# EAGLE board arca_PCAD_2021-03-29.PCB (EAGLE 9.5.0)
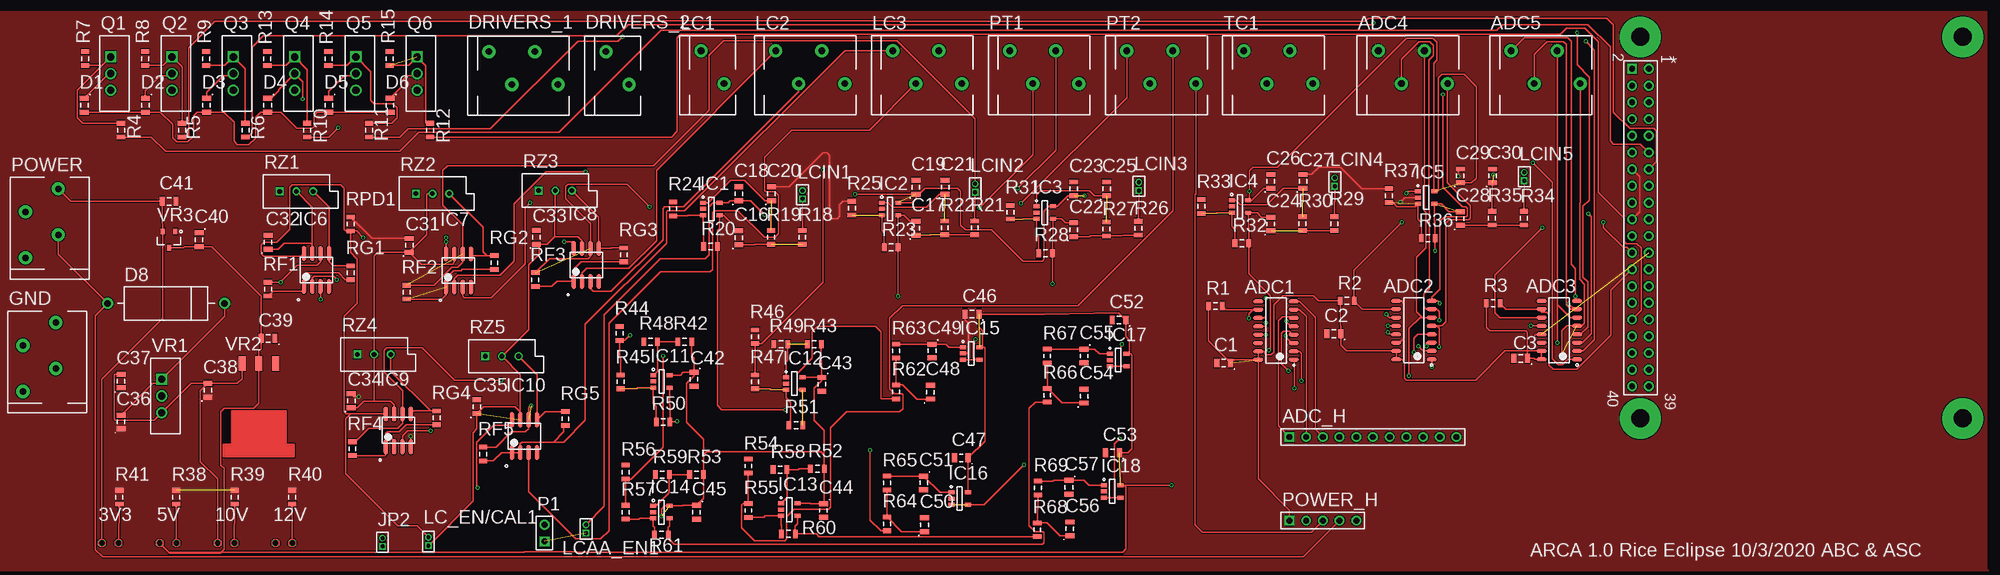
[diagram p0: board, top side]
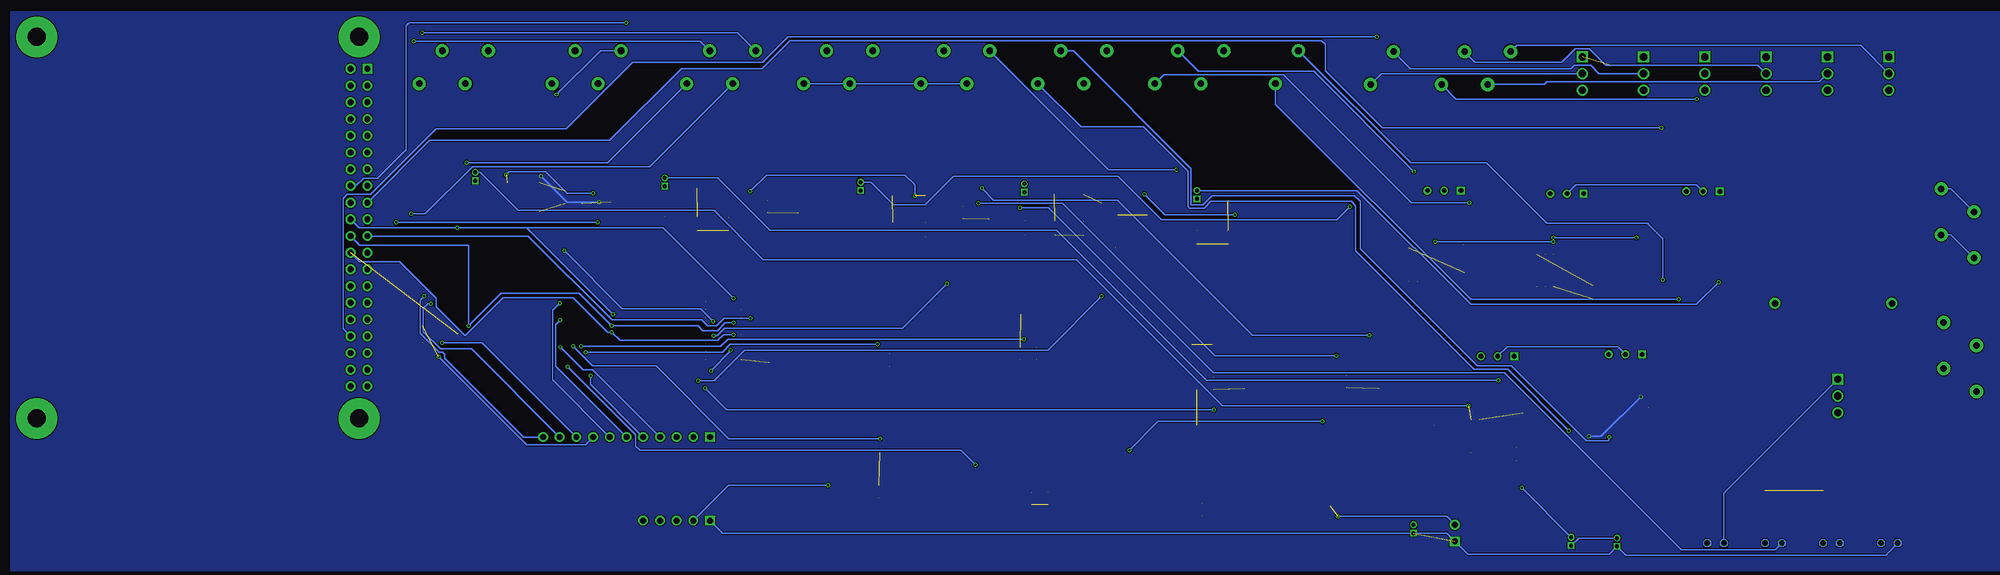
[diagram p1: board, bottom side, seen from below]

No outline drawn. Coordinates in mm, seen from the top.
Copper layers (1*16): Top 0.035mm / dielectric 1.5mm / Bottom 0.035mm
Design rules "arca_PCAD_2021-03-29": minimum track width 6mil, minimum drill 0.35mm, track to track 6mil, track to pad 6mil, pad to pad 6mil, via to via 6mil, smd to smd 6mil, copper to edge 40mil, drill to drill 6mil, minimum pad ring 0mil, minimum via ring 0mil, stop-mask expansion 4mil, vias tented up to drill 0mil, thermal gap 10mil

## Footprints (pad centres in the part's own frame; a part is rotated, then mirrored left to right if it is on the bottom)
LED5MM_1PRIMARY = drill 0.813 pad 0.584 square: 1 -1.27,0; 2 1.27,0
LED5MM_4PRIMARY = drill 0.813 pad 0.584 square: 1 -1.27,0; 2 1.27,0
LED5MM_3PRIMARY = drill 0.813 pad 0.584 square: 1 -1.27,0; 2 1.27,0
LED5MM_2PRIMARY = drill 0.813 pad 0.584 square: 1 -1.27,0; 2 1.27,0
HDR2X20_1PRIMARY = drill 0.9 pad 1.5: 1 0,2.54; 3 2.54,2.54; 4 2.54,0; 5 5.08,2.54; 6 5.08,0; 7 7.62,2.54; 8 7.62,0; 9 10.16,2.54; 10 10.16,0; 11 12.7,2.54; 12 12.7,0; 13 15.24,2.54; 14 15.24,0; 15 17.78,2.54; 16 17.78,0; 17 20.32,2.54; 18 20.32,0; 19 22.86,2.54; 20 22.86,0; 21 25.4,2.54; 22 25.4,0; 23 27.94,2.54; 24 27.94,0; 25 30.48,2.54; 26 30.48,0; 27 33.02,2.54; 28 33.02,0; 29 35.56,2.54; 30 35.56,0; 31 38.1,2.54; 32 38.1,0; 33 40.64,2.54; 34 40.64,0; 35 43.18,2.54; 36 43.18,0; 37 45.72,2.54; 38 45.72,0; 39 48.26,2.54; 40 48.26,0 | drill 0.9 pad 1.5 square: 2 0,0
SOIC127P600X175-16N_1PRIMARY = smd 1.5 x 0.6: 1 -2.7,4.445; 2 -2.7,3.175; 3 -2.7,1.905; 4 -2.7,0.635; 5 -2.7,-0.635; 6 -2.7,-1.905; 7 -2.7,-3.175; 8 -2.7,-4.445; 9 2.7,-4.445; 10 2.7,-3.175; 11 2.7,-1.905; 12 2.7,-0.635; 13 2.7,0.635; 14 2.7,1.905; 15 2.7,3.175; 16 2.7,4.445
4PINCANCONNECTOR_1PRIMARY = drill 1 pad 2: 1 0,0; 2 -5,-3.5; 3 0,-7; 4 -5,-10.5
HDR1X11_1PRIMARY = drill 0.9 pad 1.5 square: 1 0,0 | drill 0.9 pad 1.5: 2 2.54,0; 3 5.08,0; 4 7.62,0; 5 10.16,0; 6 12.7,0; 7 15.24,0; 8 17.78,0; 9 20.32,0; 10 22.86,0; 11 25.4,0
CAPCP2012X06N_3PRIMARY = smd 0.75 x 1.35: 1 -1.05,0; 2 1.05,0
CAPCP2012X06N_16PRIMARY = smd 0.75 x 1.35: 1 -1.05,0; 2 1.05,0
CAPCP2012X06N_14PRIMARY = smd 0.75 x 1.35: 1 -1.05,0; 2 1.05,0
CAPCP2012X06N_15PRIMARY = smd 0.75 x 1.35: 1 -1.05,0; 2 1.05,0
CAPCP2012X06N_13PRIMARY = smd 0.75 x 1.35: 1 -1.05,0; 2 1.05,0
CAPCP2012X06N_11PRIMARY = smd 0.75 x 1.35: 1 -1.05,0; 2 1.05,0
CAPCP2012X06N_12PRIMARY = smd 0.75 x 1.35: 1 -1.05,0; 2 1.05,0
CAPCP2012X06N_2PRIMARY = smd 0.75 x 1.35: 1 -1.05,0; 2 1.05,0
CAPCP2012X06N_10PRIMARY = smd 0.75 x 1.35: 1 -1.05,0; 2 1.05,0
CAPCP2012X06N_9PRIMARY = smd 0.75 x 1.35: 1 -1.05,0; 2 1.05,0
CAPCP2012X06N_8PRIMARY = smd 0.75 x 1.35: 1 -1.05,0; 2 1.05,0
CAPCP2012X06N_7PRIMARY = smd 0.75 x 1.35: 1 -1.05,0; 2 1.05,0
CAPCP2012X06N_6PRIMARY = smd 0.75 x 1.35: 1 -1.05,0; 2 1.05,0
CAPCP2012X06N_1PRIMARY = smd 0.75 x 1.35: 1 -1.05,0; 2 1.05,0
CAPCP2012X06N_5PRIMARY = smd 0.75 x 1.35: 1 -1.05,0; 2 1.05,0
CAPCP2012X06N_4PRIMARY = smd 0.75 x 1.35: 1 -1.05,0; 2 1.05,0
DIOC2012X06N_1PRIMARY = smd 0.75 x 1.35: 1 -1.05,0; 2 1.05,0
DIODE-0.7_1PRIMARY = drill 1 pad 1.65: 1 -8.89,0; 2 8.89,0
2POS_GREEN_BOI_1PRIMARY = drill 1 pad 2: 1 -2.286,-3.226; 2 -7.286,-6.726
P:EX244Y244D1081 = drill 2.75 pad 6.2: 1 0,0
SOT95P245X110-5N_6PRIMARY = smd 0.9 x 0.6: 1 -1.25,0.95; 2 -1.25,0; 3 -1.25,-0.95; 4 1.25,-0.95; 5 1.25,0.95
SOT95P245X110-5N_7PRIMARY = smd 0.9 x 0.6: 1 -1.25,0.95; 2 -1.25,0; 3 -1.25,-0.95; 4 1.25,-0.95; 5 1.25,0.95
SOT95P245X110-5N_5PRIMARY = smd 0.9 x 0.6: 1 -1.25,0.95; 2 -1.25,0; 3 -1.25,-0.95; 4 1.25,-0.95; 5 1.25,0.95
SOIC127P1030X265-8N_1PRIMARY = smd 2.3 x 0.6: 1 -2.5,1.905; 2 -2.5,0.635; 3 -2.5,-0.635; 4 -2.5,-1.905; 5 2.5,-1.905; 6 2.5,-0.635; 7 2.5,0.635; 8 2.5,1.905
SOIC127P1030X265-8N_2PRIMARY = smd 2.3 x 0.6: 1 -2.5,1.905; 2 -2.5,0.635; 3 -2.5,-0.635; 4 -2.5,-1.905; 5 2.5,-1.905; 6 2.5,-0.635; 7 2.5,0.635; 8 2.5,1.905
SOT95P245X110-5N_4PRIMARY = smd 0.9 x 0.6: 1 -1.25,0.95; 2 -1.25,0; 3 -1.25,-0.95; 4 1.25,-0.95; 5 1.25,0.95
SOT95P245X110-5N_2PRIMARY = smd 0.9 x 0.6: 1 -1.25,0.95; 2 -1.25,0; 3 -1.25,-0.95; 4 1.25,-0.95; 5 1.25,0.95
SOT95P245X110-5N_3PRIMARY = smd 0.9 x 0.6: 1 -1.25,0.95; 2 -1.25,0; 3 -1.25,-0.95; 4 1.25,-0.95; 5 1.25,0.95
SOT95P245X110-5N_1PRIMARY = smd 0.9 x 0.6: 1 -1.25,0.95; 2 -1.25,0; 3 -1.25,-0.95; 4 1.25,-0.95; 5 1.25,0.95
MHDR1X2_4PRIMARY = drill 0.6 pad 1 square: 1 0,0 | drill 0.6 pad 1: 2 1.27,0
2POS_GREEN_BOI_2PRIMARY = drill 1 pad 2: 1 -2.286,-3.226; 2 -7.286,-6.726
4PINCANCONNECTOR_6PRIMARY = drill 1 pad 2: 1 0,0; 2 -5,-3.5; 3 0,-7; 4 -5,-10.5
4PINCANCONNECTOR_5PRIMARY = drill 1 pad 2: 1 0,0; 2 -5,-3.5; 3 0,-7; 4 -5,-10.5
MHDR1X2_3PRIMARY = drill 0.6 pad 1 square: 1 0,0 | drill 0.6 pad 1: 2 1.27,0
MHDR1X2_2PRIMARY = drill 0.6 pad 1 square: 1 0,0 | drill 0.6 pad 1: 2 1.27,0
MHDR1X2_1PRIMARY = drill 0.6 pad 1 square: 1 0,0 | drill 0.6 pad 1: 2 1.27,0
HDR1X2_1PRIMARY = drill 0.9 pad 1.5 square: 1 0,0 | drill 0.9 pad 1.5: 2 2.54,0
HDR1X5_1PRIMARY = drill 0.9 pad 1.5 square: 1 0,0 | drill 0.9 pad 1.5: 2 2.54,0; 3 5.08,0; 4 7.62,0; 5 10.16,0
4PINCANCONNECTOR_4PRIMARY = drill 1 pad 2: 1 0,0; 2 -5,-3.5; 3 0,-7; 4 -5,-10.5
4PINCANCONNECTOR_3PRIMARY = drill 1 pad 2: 1 0,0; 2 -5,-3.5; 3 0,-7; 4 -5,-10.5
UA78M_1PRIMARY = drill 1.1 pad 1.7 square: 1 2.667,2.84 | drill 1.1 pad 1.7: 2 0.127,2.84; 3 -2.413,2.84
RESC_0805_2012_6PRIMARY = smd 0.7 x 1.25: 1 -1.05,0; 2 1.05,0
RESC_0805_2012_8PRIMARY = smd 0.7 x 1.25: 1 -1.05,0; 2 1.05,0
RESC_0805_2012_1PRIMARY = smd 0.7 x 1.25: 1 -1.05,0; 2 1.05,0
RESC_0805_2012_17PRIMARY = smd 0.7 x 1.25: 1 -1.05,0; 2 1.05,0
RESC_0805_2012_11PRIMARY = smd 0.7 x 1.25: 1 -1.05,0; 2 1.05,0
RESC_0805_2012_16PRIMARY = smd 0.7 x 1.25: 1 -1.05,0; 2 1.05,0
RESC_0805_2012_15PRIMARY = smd 0.7 x 1.25: 1 -1.05,0; 2 1.05,0
RESC_0805_2012_14PRIMARY = smd 0.7 x 1.25: 1 -1.05,0; 2 1.05,0
RESC_0805_2012_2PRIMARY = smd 0.7 x 1.25: 1 -1.05,0; 2 1.05,0
RESC_0805_2012_13PRIMARY = smd 0.7 x 1.25: 1 -1.05,0; 2 1.05,0
RESC_0805_2012_12PRIMARY = smd 0.7 x 1.25: 1 -1.05,0; 2 1.05,0
RESC_0805_2012_10PRIMARY = smd 0.7 x 1.25: 1 -1.05,0; 2 1.05,0
RESC_0805_2012_9PRIMARY = smd 0.7 x 1.25: 1 -1.05,0; 2 1.05,0
RESC_0805_2012_7PRIMARY = smd 0.7 x 1.25: 1 -1.05,0; 2 1.05,0
RESC_0805_2012_4PRIMARY = smd 0.7 x 1.25: 1 -1.05,0; 2 1.05,0
RESC_0805_2012_5PRIMARY = smd 0.7 x 1.25: 1 -1.05,0; 2 1.05,0
RESC_0805_2012_3PRIMARY = smd 0.7 x 1.25: 1 -1.05,0; 2 1.05,0
VR5_2PRIMARY = drill 0.7 pad 1.2 square: 1 -2.54,0 | drill 0.7 pad 1.2: 2 0,0; 3 2.54,0
VR5_3PRIMARY = drill 0.7 pad 1.2 square: 1 -2.54,0 | drill 0.7 pad 1.2: 2 0,0; 3 2.54,0
VR5_1PRIMARY = drill 0.7 pad 1.2 square: 1 -2.54,0 | drill 0.7 pad 1.2: 2 0,0; 3 2.54,0
4PINCANCONNECTOR_2PRIMARY = drill 1 pad 2: 1 0,0; 2 -5,-3.5; 3 0,-7; 4 -5,-10.5
LM1084ISX-5.0/NOPB_1PRIMARY = smd 2.159 x 1.067: 1 0,-2.54; 2 0,0; 3 0,2.54
SOT95P245X110-3N_1PRIMARY = smd 0.9 x 0.6: 1 -1.25,0.95; 2 -1.25,-0.95; 3 1.25,0

## Placement (x,y rotation side)
3V3  LED5MM  [LED5MM_1PRIMARY]  19.56,4.19 0 top
5V  LED5MM  [LED5MM_4PRIMARY]  28.36,4.19 0 top
10V  LED5MM  [LED5MM_3PRIMARY]  37.17,4.19 0 top
12V  LED5MM  [LED5MM_2PRIMARY]  45.97,4.19 0 top
*  raspberry_pi  [HDR2X20_1PRIMARY]  250.98,76.28 270 top
ADC1  MCP3208  [SOIC127P600X175-16N_1PRIMARY]  196.85,36.51 180 top
ADC2  MCP3208  [SOIC127P600X175-16N_1PRIMARY]  217.81,36.58 180 top
ADC3  MCP3208  [SOIC127P600X175-16N_1PRIMARY]  239.9,36.58 180 top
ADC4  PTSA_1,5/_4-3,5-Z_-_1985218  [4PINCANCONNECTOR_1PRIMARY]  212.4,79.04 90 top
ADC5  PTSA_1,5/_4-3,5-Z_-_1985218  [4PINCANCONNECTOR_1PRIMARY]  232.59,79.04 90 top
ADC_H  Header_11  [HDR1X11_1PRIMARY]  198.88,20.32 0 top
C1  Cap  [CAPCP2012X06N_3PRIMARY]  188.87,31.57 180 top
C2  Cap  [CAPCP2012X06N_3PRIMARY]  205.63,36.02 180 top
C3  Cap  [CAPCP2012X06N_3PRIMARY]  234.04,32.28 180 top
C16  1nF  [CAPCP2012X06N_16PRIMARY]  115.15,50.62 90 top
C17  1nF  [CAPCP2012X06N_14PRIMARY]  142.08,52.07 90 top
C18  0.1UF  [CAPCP2012X06N_15PRIMARY]  115.15,57.31 90 top
C19  0.1UF  [CAPCP2012X06N_14PRIMARY]  142.08,58.29 90 top
C20  1nF  [CAPCP2012X06N_15PRIMARY]  120.11,57.31 90 top
C21  1nF  [CAPCP2012X06N_14PRIMARY]  146.52,58.29 90 top
C22  1nF  [CAPCP2012X06N_14PRIMARY]  166.08,51.82 90 top
C23  0.1UF  [CAPCP2012X06N_14PRIMARY]  166.08,58.04 90 top
C24  1nF  [CAPCP2012X06N_14PRIMARY]  196.05,52.7 90 top
C25  1nF  [CAPCP2012X06N_13PRIMARY]  171.1,58.04 90 top
C26  0.1UF  [CAPCP2012X06N_14PRIMARY]  196.05,59.18 90 top
C27  1nF  [CAPCP2012X06N_13PRIMARY]  200.94,59.18 90 top
C28  1nF  [CAPCP2012X06N_11PRIMARY]  224.86,53.53 90 top
C29  0.1UF  [CAPCP2012X06N_11PRIMARY]  224.86,60.01 90 top
C30  1nF  [CAPCP2012X06N_12PRIMARY]  229.75,60.01 90 top
C31  1UF  [CAPCP2012X06N_11PRIMARY]  65.02,49.45 90 top
C32  1UF  [CAPCP2012X06N_2PRIMARY]  43.56,49.91 90 top
C33  1UF  [CAPCP2012X06N_10PRIMARY]  84.36,50.69 90 top
C34  1UF  [CAPCP2012X06N_9PRIMARY]  56.23,25.84 90 top
C35  1UF  [CAPCP2012X06N_8PRIMARY]  75.31,24.95 90 top
C36  Cap  [CAPCP2012X06N_2PRIMARY]  21.21,22.61 90 top
C37  Cap  [CAPCP2012X06N_2PRIMARY]  21.21,28.83 90 top
C38  Cap  [CAPCP2012X06N_2PRIMARY]  34.42,27.43 90 top
C39  Cap  [CAPCP2012X06N_3PRIMARY]  43.56,35.31 180 top
C40  Cap  [CAPCP2012X06N_7PRIMARY]  33.08,50.31 270 top
C41  Cap  [CAPCP2012X06N_6PRIMARY]  28.51,56.15 180 top
C42  0.1UF  [CAPCP2012X06N_1PRIMARY]  108.33,29.08 270 top
C43  0.1UF  [CAPCP2012X06N_1PRIMARY]  127.76,28.32 270 top
C44  0.1UF  [CAPCP2012X06N_1PRIMARY]  128.02,9.14 270 top
C45  0.1UF  [CAPCP2012X06N_1PRIMARY]  108.71,8.89 270 top
C46  0.1UF  [CAPCP2012X06N_5PRIMARY]  150.59,38.99 180 top
C47  0.1UF  [CAPCP2012X06N_3PRIMARY]  148.97,17.14 180 top
C48  68nF  [CAPCP2012X06N_4PRIMARY]  144.27,27.14 90 top
C49  680pF  [CAPCP2012X06N_1PRIMARY]  144.53,33.4 270 top
C50  68nF  [CAPCP2012X06N_2PRIMARY]  143.38,6.99 90 top
C51  680pF  [CAPCP2012X06N_1PRIMARY]  143.26,13.34 270 top
C52  0.1UF  [CAPCP2012X06N_3PRIMARY]  172.97,38.1 180 top
C53  0.1UF  [CAPCP2012X06N_3PRIMARY]  171.96,17.91 180 top
C54  68nF  [CAPCP2012X06N_2PRIMARY]  167.64,26.54 90 top
C55  680pF  [CAPCP2012X06N_1PRIMARY]  167.64,32.64 270 top
C56  68nF  [CAPCP2012X06N_2PRIMARY]  165.48,6.35 90 top
C57  680pF  [CAPCP2012X06N_1PRIMARY]  165.35,12.7 270 top
D1  Diode  [DIOC2012X06N_1PRIMARY]  15.62,70.74 270 top
D2  Diode  [DIOC2012X06N_1PRIMARY]  24.92,70.74 270 top
D3  Diode  [DIOC2012X06N_1PRIMARY]  34.21,70.74 270 top
D4  Diode  [DIOC2012X06N_1PRIMARY]  43.51,70.74 270 top
D5  Diode  [DIOC2012X06N_1PRIMARY]  52.81,70.74 270 top
D6  Diode  [DIOC2012X06N_1PRIMARY]  62.1,70.74 270 top
D8  Diode  [DIODE-0.7_1PRIMARY]  28.07,40.64 0 top
DRIVERS_1  1991118  [4PINCANCONNECTOR_1PRIMARY]  77.14,78.91 90 top
DRIVERS_2  0  [2POS_GREEN_BOI_1PRIMARY]  91.72,81.2 90 top
DUMMY1  [P:EX244Y244D1081]  252.25,81.15 0 top
DUMMY2  [P:EX244Y244D1081]  252.25,23.15 0 top
DUMMY3  [P:EX244Y244D1081]  301.25,23.15 0 top
DUMMY4  [P:EX244Y244D1081]  301.25,81.15 0 top
GND  1991118  [4PINCANCONNECTOR_1PRIMARY]  6.3,27.23 180 top
IC1  LMV321LICTRT  [SOT95P245X110-5N_6PRIMARY]  110.96,54.99 0 top
IC2  LMV321LICTRT  [SOT95P245X110-5N_6PRIMARY]  138.14,54.99 0 top
IC3  LMV321LICTRT  [SOT95P245X110-5N_7PRIMARY]  161.66,54.42 0 top
IC4  LMV321LICTRT  [SOT95P245X110-5N_6PRIMARY]  191.36,55.37 0 top
IC5  LMV321LICTRT  [SOT95P245X110-5N_5PRIMARY]  219.66,56.71 0 top
IC6  MCP6N11R  [SOIC127P1030X265-8N_1PRIMARY]  50.93,45.72 90 top
IC7  MCP6N11R  [SOIC127P1030X265-8N_2PRIMARY]  72.52,45.64 90 top
IC8  MCP6N11R  [SOIC127P1030X265-8N_1PRIMARY]  91.95,46.48 90 top
IC9  MCP6N11R  [SOIC127P1030X265-8N_1PRIMARY]  63.37,21.34 90 top
IC10  MCP6N11R  [SOIC127P1030X265-8N_1PRIMARY]  82.55,20.45 90 top
IC11  LMV321LICTRT  [SOT95P245X110-5N_4PRIMARY]  103.4,28.77 0 top
IC12  LMV321LICTRT  [SOT95P245X110-5N_2PRIMARY]  123.57,28.45 0 top
IC13  LMV321LICTRT  [SOT95P245X110-5N_2PRIMARY]  122.81,9.27 0 top
IC14  LMV321LICTRT  [SOT95P245X110-5N_2PRIMARY]  103.38,8.89 0 top
IC15  LMV321LICTRT  [SOT95P245X110-5N_2PRIMARY]  150.5,33.02 0 top
IC16  LMV321LICTRT  [SOT95P245X110-5N_3PRIMARY]  148.72,10.96 0 top
IC17  LMV321LICTRT  [SOT95P245X110-5N_2PRIMARY]  172.85,32 0 top
IC18  LMV321LICTRT  [SOT95P245X110-5N_1PRIMARY]  171.94,12.06 0 top
JP2  PINHD-1X2  [MHDR1X2_4PRIMARY]  60.96,3.68 90 top
LC1  0  [2POS_GREEN_BOI_2PRIMARY]  106.18,81.33 90 top
LC2  1991118  [4PINCANCONNECTOR_6PRIMARY]  120.75,79.04 90 top
LC3  1991118  [4PINCANCONNECTOR_5PRIMARY]  138.55,79.04 90 top
LC_EN/CAL1  PINHD-1X2  [MHDR1X2_4PRIMARY]  67.94,3.81 90 top
LCAA_EN1  PINHD-1X2  [MHDR1X2_3PRIMARY]  91.91,5.71 90 top
LCIN1  PINHD-1X2  [MHDR1X2_4PRIMARY]  124.84,56.52 90 top
LCIN2  PINHD-1X2  [MHDR1X2_3PRIMARY]  151.1,57.53 90 top
LCIN3  PINHD-1X2  [MHDR1X2_3PRIMARY]  175.99,57.78 90 top
LCIN4  PINHD-1X2  [MHDR1X2_2PRIMARY]  205.78,58.44 90 top
LCIN5  PINHD-1X2  [MHDR1X2_1PRIMARY]  234.59,59.27 90 top
P1  Header_2  [HDR1X2_1PRIMARY]  85.6,4.45 90 top
POWER  1991118  [4PINCANCONNECTOR_1PRIMARY]  6.68,47.55 180 top
POWER_H  Header_5  [HDR1X5_1PRIMARY]  198.88,7.62 0 top
PT1  1991118  [4PINCANCONNECTOR_4PRIMARY]  156.35,79.04 90 top
PT2  1991118  [4PINCANCONNECTOR_3PRIMARY]  174.14,79.04 90 top
Q1  FQP30N06L-ND  [UA78M_1PRIMARY]  22.48,75.44 90 top
Q2  FQP30N06L-ND  [UA78M_1PRIMARY]  31.8,75.44 90 top
Q3  FQP30N06L-ND  [UA78M_1PRIMARY]  41.12,75.44 90 top
Q4  FQP30N06L-ND  [UA78M_1PRIMARY]  50.44,75.44 90 top
Q5  FQP30N06L-ND  [UA78M_1PRIMARY]  59.77,75.44 90 top
Q6  FQP30N06L-ND  [UA78M_1PRIMARY]  69.09,75.44 90 top
R1  Res1  [RESC_0805_2012_6PRIMARY]  187.63,40.23 180 top
R2  Res1  [RESC_0805_2012_6PRIMARY]  207.65,41.02 180 top
R3  Res1  [RESC_0805_2012_6PRIMARY]  229.84,40.64 180 top
R4  Res1  [RESC_0805_2012_8PRIMARY]  21.21,66.96 90 top
R5  Res1  [RESC_0805_2012_8PRIMARY]  30.48,66.96 90 top
R6  Res1  [RESC_0805_2012_8PRIMARY]  40.13,66.96 90 top
R7  Res1  [RESC_0805_2012_1PRIMARY]  15.75,77.85 270 top
R8  Res1  [RESC_0805_2012_17PRIMARY]  24.87,77.85 270 top
R9  Res1  [RESC_0805_2012_17PRIMARY]  34.16,77.85 270 top
R10  Res1  [RESC_0805_2012_8PRIMARY]  49.53,66.96 90 top
R11  Res1  [RESC_0805_2012_8PRIMARY]  58.93,66.96 90 top
R12  Res1  [RESC_0805_2012_8PRIMARY]  68.2,66.96 90 top
R13  Res1  [RESC_0805_2012_17PRIMARY]  43.46,77.85 270 top
R14  Res1  [RESC_0805_2012_17PRIMARY]  52.76,77.85 270 top
R15  Res1  [RESC_0805_2012_17PRIMARY]  62.05,77.85 270 top
R18  24.7K  [RESC_0805_2012_11PRIMARY]  124.81,50.67 90 top
R19  164K  [RESC_0805_2012_16PRIMARY]  120.05,50.67 270 top
R20  50.6K  [RESC_0805_2012_8PRIMARY]  110.84,49.28 180 top
R21  24.7K  [RESC_0805_2012_15PRIMARY]  151.02,52.12 90 top
R22  164K  [RESC_0805_2012_14PRIMARY]  146.46,52.12 270 top
R23  50.6K  [RESC_0805_2012_6PRIMARY]  138.3,49.15 180 top
R24  12.6K  [RESC_0805_2012_2PRIMARY]  105.16,54.99 90 top
R25  12.6K  [RESC_0805_2012_2PRIMARY]  132.33,55.12 90 top
R26  24.7K  [RESC_0805_2012_2PRIMARY]  175.9,52.07 90 top
R27  164K  [RESC_0805_2012_1PRIMARY]  171.07,51.94 270 top
R28  50.6K  [RESC_0805_2012_6PRIMARY]  161.8,48.26 180 top
R29  24.7K  [RESC_0805_2012_13PRIMARY]  205.71,52.76 90 top
R30  164K  [RESC_0805_2012_12PRIMARY]  200.88,52.76 270 top
R31  12.6K  [RESC_0805_2012_11PRIMARY]  156.43,54.48 90 top
R32  50.6K  [RESC_0805_2012_6PRIMARY]  191.64,49.78 180 top
R33  12.6K  [RESC_0805_2012_11PRIMARY]  185.51,55.37 90 top
R34  24.7K  [RESC_0805_2012_10PRIMARY]  234.51,53.58 90 top
R35  164K  [RESC_0805_2012_9PRIMARY]  229.69,53.58 270 top
R36  50.6K  [RESC_0805_2012_6PRIMARY]  219.96,50.55 180 top
R37  12.6K  [RESC_0805_2012_2PRIMARY]  214,57.02 90 top
R38  140  [RESC_0805_2012_2PRIMARY]  29.59,11.18 90 top
R39  470  [RESC_0805_2012_1PRIMARY]  38.48,11.18 270 top
R40  530  [RESC_0805_2012_1PRIMARY]  47.24,11.18 270 top
R41  39  [RESC_0805_2012_2PRIMARY]  20.95,11.18 90 top
R42  20K  [RESC_0805_2012_6PRIMARY]  106.93,34.8 180 top
R43  20K  [RESC_0805_2012_6PRIMARY]  126.62,34.42 180 top
R44  22  [RESC_0805_2012_1PRIMARY]  97.03,36.07 270 top
R45  20K  [RESC_0805_2012_2PRIMARY]  97.15,28.7 90 top
R46  22  [RESC_0805_2012_1PRIMARY]  117.6,35.56 270 top
R47  20K  [RESC_0805_2012_2PRIMARY]  117.6,28.7 90 top
R48  3K  [RESC_0805_2012_6PRIMARY]  101.73,34.8 180 top
R49  3K  [RESC_0805_2012_6PRIMARY]  121.54,34.42 180 top
R50  150K  [RESC_0805_2012_6PRIMARY]  103.63,22.61 180 top
R51  150K  [RESC_0805_2012_6PRIMARY]  123.82,22.1 180 top
R52  20K  [RESC_0805_2012_8PRIMARY]  127.09,15.49 180 top
R53  20K  [RESC_0805_2012_6PRIMARY]  108.71,14.61 180 top
R54  22  [RESC_0805_2012_7PRIMARY]  116.59,15.91 270 top
R55  20K  [RESC_0805_2012_2PRIMARY]  116.59,9.14 90 top
R56  22  [RESC_0805_2012_1PRIMARY]  97.92,14.99 270 top
R57  20K  [RESC_0805_2012_2PRIMARY]  97.92,8.89 90 top
R58  3K  [RESC_0805_2012_6PRIMARY]  121.41,15.37 180 top
R59  3K  [RESC_0805_2012_6PRIMARY]  103.5,14.61 180 top
R60  150K  [RESC_0805_2012_6PRIMARY]  122.68,5.59 180 top
R61  150K  [RESC_0805_2012_6PRIMARY]  103.38,5.46 180 top
R62  1.5K  [RESC_0805_2012_1PRIMARY]  139.06,27.18 270 top
R63  150K  [RESC_0805_2012_1PRIMARY]  139.06,33.4 270 top
R64  1.5K  [RESC_0805_2012_1PRIMARY]  137.67,7.11 270 top
R65  150K  [RESC_0805_2012_1PRIMARY]  137.67,13.34 270 top
R66  1.5K  [RESC_0805_2012_1PRIMARY]  162.05,26.67 270 top
R67  150K  [RESC_0805_2012_1PRIMARY]  162.05,32.64 270 top
R68  1.5K  [RESC_0805_2012_1PRIMARY]  160.53,6.22 270 top
R69  150K  [RESC_0805_2012_1PRIMARY]  160.65,12.57 270 top
RF1  20K  [RESC_0805_2012_1PRIMARY]  43.56,42.8 270 top
RF2  20K  [RESC_0805_2012_4PRIMARY]  64.64,42.34 270 top
RF3  20K  [RESC_0805_2012_1PRIMARY]  84.2,44.26 270 top
RF4  20K  [RESC_0805_2012_1PRIMARY]  56.39,18.54 270 top
RF5  20K  [RESC_0805_2012_5PRIMARY]  76.26,17.73 270 top
RG1  200  [RESC_0805_2012_1PRIMARY]  56.13,45.28 270 top
RG2  200  [RESC_0805_2012_4PRIMARY]  77.98,46.84 270 top
RG3  200  [RESC_0805_2012_1PRIMARY]  97.66,48.01 270 top
RG4  200  [RESC_0805_2012_1PRIMARY]  69.22,23.24 270 top
RG5  200  [RESC_0805_2012_3PRIMARY]  88.77,23.13 270 top
RPD1  20K  [RESC_0805_2012_2PRIMARY]  56.13,52.7 90 top
RZ1  RPot  [VR5_2PRIMARY]  47.88,57.66 0 top
RZ2  RPot  [VR5_3PRIMARY]  68.58,57.32 0 top
RZ3  RPot  [VR5_2PRIMARY]  87.25,57.78 0 top
RZ4  RPot  [VR5_2PRIMARY]  59.69,32.89 0 top
RZ5  RPot  [VR5_1PRIMARY]  79.12,32.59 0 top
TC1  1991118  [4PINCANCONNECTOR_2PRIMARY]  191.94,79.04 90 top
VR1  UA78M  [UA78M_1PRIMARY]  30.23,26.42 90 top
VR2  LM1084ISX-5.0/NOPB  [LM1084ISX-5.0/NOPB_1PRIMARY]  42.16,31.5 90 top
VR3  AP2210N-3.3TRG1  [SOT95P245X110-3N_1PRIMARY]  28.51,50.31 270 top

## Library data of the parts
3V3 5V 10V 12V * ADC1-ADC5 ADC_H C1-C3 C16-C57 D1-D6 D8 DRIVERS_1 DRIVERS_2 DUMMY1-DUMMY4 GND IC1-IC18 JP2 LC1-LC3 LC_EN/CAL1 LCAA_EN1 LCIN1-LCIN5 P1 POWER POWER_H PT1 PT2 Q1-Q6 R1-R15 R18-R69 RF1-RF5 RG1-RG5 RPD1 RZ1-RZ5 TC1 VR1-VR3 = arca_PCAD_2021-03-29

## Nets
+3V3: 3V3.1 ADC1.16 C1.1 JP2.1 LCAA_EN1.1 P1.1 VR3.2
+3V3_LC: C31.1 C32.1 C33.1 C34.1 C35.1 IC6.7 IC7.7 IC8.7 IC9.7 IC10.7 JP2.2 LC_EN/CAL1.1 RZ1.2 RZ2.2 RZ3.2 RZ4.2 RZ5.2
+3V3_LCAA: C18.1 C19.1 C23.1 C26.1 C29.1 IC1.5 IC2.5 IC3.5 IC4.5 IC5.5 LCAA_EN1.2
+3V3_PT: C42.1 C43.1 C44.1 C45.1 IC11.5 IC12.5 IC13.5 IC14.5 P1.2 R42.1 R43.1 R52.1 R53.1
+5V: 5V.1 C39.2 C40.2 C46.1 C47.1 C52.1 C53.1 IC15.5 IC16.5 IC17.5 IC18.5 POWER_H.2 VR2.2 VR3.3
+10V: 10V.1 C37.2 C38.2 POWER_H.3 VR1.3 VR2.3
+12: D1.2 D2.2 D3.2 D4.2 D5.2 D6.2
ADC1_A5: ADC1.6 ADC_H.1
ADC1_A6: ADC1.7 ADC_H.2
ADC1_A7: ADC1.8 ADC_H.3
ADC1_CS: *.22 ADC1.10 R1.1
ADC2_A4: ADC2.5 ADC_H.4
ADC2_A5: ADC2.6 ADC_H.5
ADC2_A6: ADC2.7 ADC_H.6
ADC2_A7: ADC2.8 ADC_H.7
ADC2_CS: *.24 ADC2.10 R2.1
ADC3_A4: ADC3.5 ADC_H.8
ADC3_A5: ADC_H.9
ADC3_A6: ADC_H.10
ADC3_A7: ADC_H.11
ADC3_CS: *.26 ADC3.10 R3.1
CAL: IC6.8 IC7.8 IC8.8 IC9.8 IC10.8 LC_EN/CAL1.2 RPD1.1
DRIVER_1: *.11 R4.1
DRIVER_1_NEGATIVE: D1.1 Q1.2
DRIVER_2: *.13 R5.1
DRIVER_2_NEGATIVE: D2.1 Q2.2
DRIVER_3: *.15 R6.1
DRIVER_3_NEGATIVE: D3.1 Q3.2
DRIVER_4: *.18 R10.1
DRIVER_4_NEGATIVE: D4.1 Q4.2
DRIVER_5: *.33 R11.1
DRIVER_5_NEGATIVE: D5.1 DRIVERS_2.1 Q5.2
DRIVER_6: *.32 R12.1
DRIVER_6_NEGATIVE: D6.1 DRIVERS_2.2 Q6.2
GND: C36.1 C38.1 R38.2 R39.1 R40.1 R41.2
LC1: ADC1.1 C16.2 IC1.4 R20.1
LC1_OUT_N: IC6.2 LC1.1
LC1_OUT_P: IC6.3 LC1.2
LC1_PREC: IC6.6 LCIN1.2 RF1.1
LC2: ADC1.2 C17.2 IC2.4 R23.1
LC2_OUT_N: IC7.2
LC2_OUT_P: IC7.3
LC2_PREC: IC7.6 LCIN2.2 RF2.1
LC3: ADC1.3 C22.2 IC3.4 R28.1
LC3_OUT_N: IC8.2
LC3_OUT_P: IC8.3
LC3_PREC: IC8.6 LCIN3.2 RF3.1
LC4: ADC1.4 C24.2 IC4.4 R32.1
LC4_OUT_N: IC9.2
LC4_OUT_P: IC9.3
LC4_PREC: IC9.6 LCIN4.2 RF4.1
LC5: ADC1.5 C28.2 IC5.4 R36.1
LC5_OUT_N: IC10.1 IC10.2 RF5.2 RG5.2
LC5_OUT_P: IC10.3
LC5_PREC: IC10.6 LCIN5.2 RF5.1
MISO: *.21 ADC1.12 ADC2.12 ADC3.12
MOSI: *.19 ADC1.11 ADC2.11 ADC3.11
NET3V3_K: 3V3.2 R41.1
NET5V_K: 5V.2 R38.1
NET10V_K: 10V.2 R39.2
NET12V_A: 12V.1 C36.2 D8.2 VR1.1
NET12V_K: 12V.2 R40.2
NETC16_1: C16.1 R18.1 R19.2
NETC17_1: C17.1 R21.1 R22.2
NETC20_1: C20.1 IC1.1 R19.1
NETC21_1: C21.1 IC2.1 R22.1
NETC22_1: C22.1 R26.1 R27.2
NETC24_1: C24.1 R29.1 R30.2
NETC25_1: C25.1 IC3.1 R27.1
NETC27_1: C27.1 IC4.1 R30.1
NETC28_1: C28.1 R34.1 R35.2
NETC30_1: C30.1 IC5.1 R35.1
NETC48_1: C48.1 R62.1 R63.2
NETC49_1: C49.1 IC15.1 R63.1
NETC50_1: C50.1 R64.1 R65.2
NETC51_1: C51.1 IC16.1 R65.1
NETC54_1: C54.1 R66.1 R67.2
NETC55_1: C55.1 IC17.1 R67.1
NETC56_1: C56.1 R68.1 R69.2
NETC57_1: C57.1 IC18.1 R69.1
NETIC1_3: IC1.3 R20.2 R24.1
NETIC2_3: IC2.3 R23.2 R25.1
NETIC3_3: IC3.3 R28.2 R31.1
NETIC4_3: IC4.3 R32.2 R33.1
NETIC5_3: IC5.3 R36.2 R37.1
NETIC6_1: IC6.1 RF1.2 RG1.2
NETIC6_5: IC6.5 RG1.1 RZ1.3
NETIC7_1: IC7.1 RF2.2 RG2.2
NETIC7_5: IC7.5 RG2.1 RZ2.3
NETIC8_1: IC8.1 RF3.2 RG3.2
NETIC8_5: IC8.5 RG3.1 RZ3.3
NETIC9_1: IC9.1 RF4.2 RG4.2
NETIC9_5: IC9.5 RG4.1 RZ4.3
NETIC10_5: IC10.5 RG5.1 RZ5.3
NETIC11_1: IC11.1 R42.2 R48.1
NETIC11_3: IC11.3 R45.1 R50.2
NETIC12_1: IC12.1 R43.2 R49.1
NETIC12_3: IC12.3 R47.1 R51.2
NETIC13_1: IC13.1 R52.2 R58.1
NETIC13_3: IC13.3 R55.1 R60.2
NETIC14_1: IC14.1 R53.2 R59.1
NETIC14_3: IC14.3 R57.1 R61.2
NETLCIN1_1: LCIN1.1 R18.2
NETLCIN2_1: LCIN2.1 R21.2
NETLCIN3_1: LCIN3.1 R26.2
NETLCIN4_1: LCIN4.1 R29.2
NETLCIN5_1: LCIN5.1 R34.2
NETQ1_1: Q1.1 R4.2 R7.2
NETQ2_1: Q2.1 R5.2 R8.2
NETQ3_1: Q3.1 R6.2 R9.2
NETQ4_1: Q4.1 R10.2 R13.2
NETQ5_1: Q5.1 R11.2 R14.2
NETQ6_1: Q6.1 R12.2 R15.2
PT1: ADC2.1 IC16.3 IC16.4
PT1_OUT: R44.2 R45.2
PT1_PREC: IC11.4 R50.1 R64.2
PT2: ADC2.2 IC15.3 IC15.4
PT2_OUT: R46.2 R47.2
PT2_PREC: IC12.4 R51.1 R62.2
PT3: ADC2.3 IC18.3 IC18.4
PT3_OUT: R54.2 R55.2
PT3_PREC: IC13.4 R60.1 R68.2
PT4: ADC2.4 IC17.3 IC17.4
PT4_OUT: R56.2 R57.2
PT4_PREC: IC14.4 R61.1 R66.2
SCK: *.23 ADC1.13 ADC2.13 ADC3.13
TC3: ADC3.3
TC4: ADC3.4

## Tracks (layer width: path | path; a pad name or v marks a point on that pad's centre or on a via)
+3V3  (4 unrouted)
  Top 0.254: 235.09,33.4 231.65,33.4 227.21,28.96 216.66,28.96 216.36,29.26 216.36,31.72 215.95,32.13 215.1,32.13 215.1,33.4 207.52,33.4 206.68,34.24 206.68,36.02 206.59,38.59 206.59,41.02 203.25,41.02 202.49,41.78 197.88,41.78 196.51,40.42 196.51,33.22 196.09,32.8 195.33,32.8 195.05,33.07 195.05,33.34 194.15,33.34 ADC1.16 194.13,32.07 | 235.09,33.4 237.2,33.4 237.2,32.13 236.22,32.13 236.07,32.28 235.09,32.28 235.09,33.4 | 235.09,33.4 235.09,36.18 234.79,36.47 229.36,36.47 228.79,37.04 228.79,40.64 | 194.13,32.07 190.42,32.07 C1.1 186.58,34.92 186.58,40.23 | 194.13,32.07 194.13,13.97 198.88,9.22 198.88,7.62 | 11.68,58.05 13.58,56.15 27.46,56.15 27.46,53.95 VR3.2 27.56,38.35 18.29,29.08 3V3.1
  Bottom 0.254: 198.88,7.62 196.98,5.71 86.87,5.71 P1.1 83.64,2.49 62.15,2.49 JP2.1 59.64,2.36 20.12,2.36 3V3.1 | 11.68,58.05 10.18,58.05 6.68,54.55
+3V3_LC  (5 unrouted)
  Top 0.254: 84.78,49.63 86.01,49.63 87.15,50.77 | 84.78,49.63 84.78,48.11 83.16,46.48 83.16,36.63 RZ5.2 81.92,29.8 81.92,24.13 | IC10.7 81.92,24.13 | 50.29,49.54 50.29,55.24 RZ1.2 | 59.69,25.76 58.12,25.76 57.15,24.79 C34.1 | 59.69,25.76 62.23,25.76 62.74,25.25 IC9.7 | 87.15,50.77 RZ3.2 | 59.69,25.76 RZ4.2 59.69,47.89 60.2,48.4 C31.1 | 87.15,50.77 90.68,50.77 91.31,50.14 IC8.7 | LC_EN/CAL1.1 74.74,10.61 74.74,20.97 75.31,21.54 C35.1 75.35,23.9 76.35,24.89 81.15,24.89 81.92,24.13 | C33.1 84.78,49.63 | C32.1 45.08,48.86 46.01,49.8 50.04,49.8 50.29,49.54 | IC6.7 50.29,49.54 | IC7.7 71.88,46.88 71.63,46.62 71,46.62 70.99,46.61 66.81,46.61 C31.1 | RZ2.2 67.82,57.32 67.67,57.17 67.67,51.04 C31.1
  Bottom 0.254: JP2.2 66.8,4.95 LC_EN/CAL1.1 | RZ2.2 67.25,58.65 48.87,58.65 RZ1.2 | RZ4.2 60.86,34.06 77.65,34.06 RZ5.2
+3V3_LCAA  (via drill 0.3 pad 0.6)  (5 unrouted)
  Top 0.254: 192.76,56.32 193.16,56.32 194.97,58.13 C26.1 | 192.76,56.32 v192.76,57.66 192.76,60.78 193.29,61.32 197.03,61.32 216.64,80.93 220.73,80.93 221.29,80.37 221.29,77.61 220.83,77.15 220.83,57.66 221.39,57.66 221.51,57.78 221.51,74.93 222.02,75.44 225.45,75.44 227.31,73.58 227.31,59.69 226.57,58.96 C29.1 | C19.1 142.54,57.24 143.47,58.17 148.39,58.17 148.9,57.66 148.9,52.53 149.61,51.82 153.59,51.82 158.34,47.07 161.29,47.07 161.57,47.35 161.57,54.63 162.31,55.37 IC3.5 163.6,55.37 165.22,56.99 v167.74,56.99 | C19.1 142.09,56.55 141.48,55.94 IC2.5 | LCAA_EN1.2 94.69,9.76 94.69,38.92 103.18,47.41 110.05,47.41 110.65,48.01 110.65,55.36 111.23,55.94 IC1.5 113.51,55.94 113.83,56.26 C18.1 116.92,56.26 v119.07,54.11 | v132.83,57.24 C19.1 | IC4.5 192.76,56.32
  Bottom 0.254: v167.74,56.99 167.74,58.67 169.22,60.15 190.27,60.15 v192.76,57.66 | v132.83,57.24 129.7,54.11 v119.07,54.11
+3V3_PT  (via drill 0.3 pad 0.6)  (3 unrouted)
  Top 0.254: 128.14,17.53 R52.1 128.14,10.19 C44.1 126.04,10.19 126.01,10.22 IC13.5 | 128.14,17.53 128.14,21.36 126.62,22.89 126.62,27.74 127.76,28.88 C43.1 | 109.76,17.53 109.76,20.02 107.19,22.59 107.19,28.5 108.33,29.64 C42.1 | 128.14,17.53 127.63,18.04 110.28,18.04 109.76,17.53 | 109.76,17.53 R53.1 109.76,10.99 C45.1 106.7,9.94 106.6,9.84 103.89,9.84 103.38,9.33 v103.38,8.26 | R42.1 107.98,32.63 108.33,32.28 C42.1 | C42.1 106.69,30.13 106.27,29.72 IC11.5 | R43.1 127.67,31.92 127.76,31.83 C43.1 | C43.1 126.29,29.37 126.26,29.4 IC12.5
  Bottom 0.254: P1.2 86.87,8.26 v103.38,8.26
+5V  (via drill 0.3 pad 0.6)  (6 unrouted)
  Top 0.254: 174.53,32.95 174.75,32.95 174.93,32.78 174.93,18.54 174.29,17.91 C53.1 173.01,15.55 173.19,15.37 IC18.5 173.74,13.02 | 174.53,32.95 174.53,35.05 174.02,35.56 C52.1 172.88,39.24 161.65,38.99 C46.1 151.64,37.04 152.18,36.5 152.18,33.97 | 152.18,33.97 152.4,33.97 152.58,33.79 152.58,19.7 C47.1 150.02,14.53 149.97,14.48 IC16.5 | IC15.5 152.18,33.97 | 173.74,13.02 v180.94,13.02 | 36.45,2.79 36.32,2.67 28.62,2.67 28.49,2.79 | 36.45,2.79 36.88,3.23 36.88,15.54 36.37,16.05 36.37,24.13 36.93,24.69 41.4,24.69 42.16,25.45 VR2.2 42.16,33.4 42.51,33.75 C39.2 42.51,41.73 34.98,49.26 C40.2 30.88,49.26 30.68,49.06 VR3.3 | 36.45,2.79 82.5,2.79 82.56,2.86 90.42,2.86 90.49,2.79 173.53,2.79 174.04,3.3 174.04,12.71 173.74,13.02 | 28.49,2.79 36.45,2.79 | 5V.1 28.49,2.79 | IC17.5 174.53,32.95
  Bottom 0.254: POWER_H.2 196.03,13.02 v180.94,13.02
+10V  (via drill 0.3 pad 0.6)  (5 unrouted)
  Top 0.254: 10V.1 35.9,13.96 33.27,16.59 33.27,27.34 C38.2 | v151.74,55.14 159.85,63.25 159.85,74.04 | POWER_H.3 202.21,5.87 185.62,5.87 184.51,6.99 184.51,57.15 184.64,57.29 184.64,74.04 | C37.2 20.3,29.88 20.14,29.72 20.14,23.06 20.32,22.89 26.27,22.89 VR1.3 31.86,28.48 C38.2 | VR2.3 39.62,29.21 38.9,28.48 C38.2
  Bottom 0.254: 10V.1 36.89,3.2 51.21,3.2 78.11,30.1 122.35,30.1 147.4,55.14 v151.74,55.14 | 159.85,74.04 184.64,74.04
+12
  Top 0.254: D6.2 D5.2 51.05,69.69 50.55,69.18 50.55,67.51 50.29,67.26 47.93,67.26 45.5,69.69 D4.2 42.42,69.69 41.65,68.92 41.65,65.78 40.64,64.77 38.89,64.77 38.38,65.28 38.38,68.14 36.83,69.69 D3.2 32.77,69.69 32.26,69.18 32.26,66.06 31.37,65.18 29.64,65.18 29.03,65.79 29.03,67.83 27.18,69.69 D2.2 D1.2
+12V  (1 unrouted)
  Top 0.254: 206.5,7.62 200.99,2.11 18.39,2.11 17.3,3.2 17.3,38.76 19.18,40.64 11.68,48.13 11.68,51.05
  Bottom 0.254: 11.68,51.05 10.18,51.05 6.68,47.55
ADC1_A5  (1 unrouted)
  Top 0.254: ADC_H.1 197.18,22.02 197.18,37.97 197.84,38.63 199.15,38.63 199.36,38.42 ADC1.6
ADC1_A6  (2 unrouted)
  Top 0.254: ADC_H.2 201.42,38.67 200.41,39.69 ADC1.7
ADC1_A7  (2 unrouted)
  Top 0.254: ADC_H.3 202.82,21.46 202.82,38.54 200.41,40.96 ADC1.8
ADC1_CS  (via drill 0.3 pad 0.6)  (1 unrouted)
  Top 0.254: 193.29,39.69 189.23,39.69 R1.1 | 193.29,39.69 ADC1.10 | v192.68,38.35 192.68,39.08 193.29,39.69
  Bottom 0.254: *.22 226.53,50.88 213.78,38.12 200.16,38.12 199.25,37.21 197.87,37.21 196.73,38.35 v192.68,38.35
ADC2_A4  (via drill 0.3 pad 0.6)  (1 unrouted)
  Top 0.254: ADC2.5 221.26,37.21 | 221.26,37.21 222.02,37.21 222.69,37.88 222.69,52.8 223.21,53.32 226.15,53.32 226.43,53.59 226.43,55.48 222.9,59.01 222.9,74.04 | 221.26,37.21 221.64,36.83 v221.64,34.01
  Bottom 0.254: v221.64,34.01 218.15,30.52 216.7,30.52 ADC_H.4
ADC2_A5  (via drill 0.3 pad 0.6)
  Top 0.254: 219.1,38.48 218.69,38.48 217.04,36.83 v217.04,29.64 | 219.1,38.48 ADC2.6 | 219.1,38.48 218.21,39.37 218.21,47.62 219.66,49.07 219.66,54.48 219.4,54.74 219.4,79.04
  Bottom 0.254: v217.04,29.64 217.04,28.32 ADC_H.5
ADC2_A6  (via drill 0.3 pad 0.6)  (1 unrouted)
  Top 0.254: v221.69,38.05 221.69,39.37 221.31,39.75 ADC2.7 219.71,39.75 219.35,40.11 219.35,42.06 220.17,42.88 220.17,54.98 220.07,55.07 220.07,77.58 220.78,78.29 220.78,79.86 220.22,80.42 218.6,80.42 215.9,77.72 215.9,74.04
  Bottom 0.254: ADC_H.6 222.33,31.06 222.33,37.41 v221.69,38.05
ADC2_A7  (via drill 0.3 pad 0.6)  (1 unrouted)
  Top 0.254: v222.2,72.39 222.2,58.29 225.15,55.34 225.7,55.34 225.92,55.12 225.92,53.98 225.77,53.83 222.51,53.83 221.77,53.09 221.77,42.8 220.5,41.54 ADC2.8 221.38,41.02 v221.72,40.68
  Bottom 0.254: v222.2,72.39 215.55,79.04 212.4,79.04 | ADC_H.7 222.83,29.03 222.83,39.57 v221.72,40.68
ADC2_CS  (via drill 0.3 pad 0.6)  (1 unrouted)
  Top 0.254: *.24 250.18,49.14 249.63,49.14 246.61,52.16 v246.61,52.96 | v216,52.96 208.69,45.65 R2.1 209.97,39.75 ADC2.10
  Bottom 0.254: v216,52.96 v246.61,52.96
ADC3_A4  (via drill 0.3 pad 0.6)  (1 unrouted)
  Top 0.254: 243.09,74.04 243.09,55.91 243.02,55.83 243.02,44.29 243.74,43.57 243.74,37.59 243.36,37.21 241.05,37.21 240.33,36.49 240.33,32.69 v240.16,32.51
  Bottom 0.254: ADC_H.8 217.83,19.15 226.8,19.15 v240.16,32.51
ADC3_A5  (via drill 0.3 pad 0.6)  (1 unrouted)
  Top 0.254: v239.59,34.63 239.59,40.44 | 239.59,40.44 239.59,79.04 | 242.6,38.48 241.55,38.48 239.59,40.44
  Bottom 0.254: ADC_H.9 233.51,34.63 v239.59,34.63
ADC3_A6  (via drill 0.3 pad 0.6)  (1 unrouted)
  Top 0.254: 242.16,39.75 241.66,39.75 241,40.41 241,80.01 240.56,80.44 238,80.44 236.09,78.54 236.09,74.04 | 242.16,39.75 242.6,39.75 | v241.32,40.59 242.16,39.75
  Bottom 0.254: v241.32,40.59 241.76,40.59 242.47,39.88 242.47,36.35 239.82,33.7 235.12,33.7 ADC_H.10
ADC3_A7  (via drill 0.3 pad 0.6)  (1 unrouted)
  Top 0.254: 242.6,41.02 242.37,41.02 v242.37,41.71 242.37,45.92 241.71,46.58 241.71,80.52 241.19,81.04 234.59,81.04 232.59,79.04
  Bottom 0.254: v242.37,41.71 242.98,41.1 242.98,36.07 240.1,33.19 239.52,33.19 239.22,32.89 239.22,32.31 227.23,20.32 ADC_H.11
ADC3_CS  (1 unrouted)
  Top 0.254: R3.1 231.78,39.75 ADC3.10 237.2,39.32 238,39.32 238.35,38.96 238.35,31.24 239.01,30.59 242.58,30.59 247.78,35.79 247.78,42.6 *.26
CAL  (via drill 0.3 pad 0.6)  (1 unrouted)
  Top 0.254: v88.59,50.01 90.04,50.01 IC8.8 | v70.61,50.65 v70.61,50.01 IC7.8 | 56.11,23.85 55.45,23.85 55.17,24.13 55.17,38.68 57.15,40.66 57.15,47.37 56.13,48.39 RPD1.1 | 56.11,23.85 IC9.8 | v58.01,50.65 57.01,51.66 RPD1.1 | IC10.8 80.64,22.1 77.84,22.1 75.25,19.51 75.25,12.76 v75.44,12.57 | 56.11,23.85 55.37,23.11 55.37,14.73 63.3,6.81 66.22,6.81 LC_EN/CAL1.2 | RPD1.1 55.37,51.66 55.12,51.91 55.12,58.14 54.61,58.65 47.24,58.65 46.89,58.29 46.89,51.92 44.88,49.91 42.88,49.91 42.49,49.53 42.49,48.21 42.93,47.78 48.62,47.78 49.02,48.18 IC6.8
  Bottom 0.254: v58.01,50.65 v70.61,50.65 | LC_EN/CAL1.2 v75.44,12.57 | v70.61,50.01 v88.59,50.01
DRIVER_1  (1 unrouted)
  Top 0.254: *.11 252.25,64.85 248.16,64.85 247.65,65.35 247.65,79.63 244.27,83.01 231.29,83.01 230.45,82.17 103.35,82.17 87.86,66.67 66.47,66.67 63.55,63.75 27.99,63.75 25.83,65.91 R4.1
DRIVER_1_NEGATIVE
  Top 0.254: Q1.2 19.64,75.06 18.89,75.06 D1.1
  Bottom 0.254: Q1.2 23.92,79.84 76.22,79.84 77.14,78.91
DRIVER_2  (1 unrouted)
  Top 0.254: R5.1 31.24,65.91 31.5,66.17 31.5,79.53 35.48,83.52 103.52,83.52 103.59,83.59 137.49,83.59 137.56,83.52 210.37,83.52 210.85,84 247.11,84 248.16,82.96 248.16,69.72 250.62,67.26 254.25,67.26 254.66,66.85 254.66,62.18 *.13
DRIVER_2_NEGATIVE
  Top 0.254: Q2.2 28.96,75.21 27.18,75.21 24.92,72.95 D2.1
  Bottom 0.254: 80.64,73.91 72.01,73.91 71.63,74.3 30.23,74.3 Q2.2
DRIVER_3  (via drill 0.3 pad 0.6)  (1 unrouted)
  Top 0.254: v211.66,83.31 211.33,82.98 98.28,82.98 96.6,81.31 42.85,81.31 41.14,79.59 41.14,66.56 40.49,65.91 R6.1
  Bottom 0.254: *.15 252.73,58.5 251.59,59.64 249.43,59.64 245.11,63.96 245.11,82.8 244.6,83.31 v211.66,83.31
DRIVER_3_NEGATIVE
  Top 0.254: Q3.2 38.28,75.21 36.73,75.21 34.21,72.69 D3.1
  Bottom 0.254: 84.14,78.91 82.55,77.32 69.33,77.32 67.31,79.34 65.15,79.34 62.62,76.81 39.53,76.81 Q3.2
DRIVER_4  (via drill 0.3 pad 0.6)
  Top 0.254: R10.1 52.81,65.91 v54.23,67.33
  Bottom 0.254: v54.23,67.33 96.67,67.33 105.31,75.97 105.31,80.01 105.89,80.59 186.72,80.59 190.98,76.33 203.22,76.33 214.12,65.43 241.5,65.43 *.18
DRIVER_4_NEGATIVE  (via drill 0.3 pad 0.6)
  Top 0.254: D4.1 44,71.79 45.18,72.97 45.18,73.14 Q4.2 48.84,74.33 v48.84,71.7
  Bottom 0.254: 87.64,73.91 85.44,71.7 v48.84,71.7
DRIVER_5  (via drill 0.3 pad 0.6)  (1 unrouted)
  Top 0.254: R11.1 63.55,65.91 64.85,67.21 77.37,67.21 90.68,80.52 96.83,80.52 v97.46,81.15
  Bottom 0.254: v97.46,81.15 187.05,81.15 190.91,77.29 210.69,77.29 220.8,67.18 240.54,67.18 250.5,57.23 254.08,57.23 254.66,56.64 254.66,36.78 *.33
DRIVER_5_NEGATIVE  (1 unrouted)
  Top 0.254: Q5.2 56.93,75.21 55.12,75.21 52.81,72.9 D5.1
  Bottom 0.254: Q5.2 63.7,75.56 64.97,76.83 67.49,76.83 68,76.33 92.35,76.33 DRIVERS_2.1
DRIVER_6
  Top 0.254: R12.1 104.9,65.91 105.79,66.8 105.79,81.03 106.32,81.56 240.08,81.56 241,82.47 243.76,82.47 245.85,80.39 245.85,57.53 249.83,53.54 249.83,50.04 250.14,49.73 251.71,49.73 252.37,49.07 252.37,39.57 *.32
DRIVER_6_NEGATIVE  (2 unrouted)
  Top 0.254: Q6.2 66.25,75.21 64.64,75.21 63.86,74.42 63.86,73.54 D6.1
  Bottom 0.254: Q6.2 96.79,75.56 DRIVERS_2.2
GND  (via drill 0.3 pad 0.6)  (1 unrouted)
  Top 0.254: v224.56,59.94 224.56,61.06 224.86,61.06 | 65.28,18.84 v65.28,20.42 | v57.37,26.47 56.64,26.47 56.23,26.89 | 120.11,58.36 122.8,58.36 127.94,63.5 128.6,63.5 128.97,63.13 128.97,53.83 129.29,53.51 130.13,53.51 130.47,53.85 130.47,55.63 131.01,56.17 132.33,56.17 | 218.41,56.71 216.45,56.71 v215.77,56.03 | 214,58.07 209.88,58.07 206.61,61.34 203.34,61.34 202.24,60.23 200.94,60.23 | 65.02,50.5 59.39,50.5 56.13,53.76 | 149.54,38.99 149.54,38.15 150.09,37.6 150.09,33.27 149.84,33.02 149.25,33.02 | 250.98,61.04 252.12,59.89 252.12,54.56 250.98,53.42 | 215.1,34.67 215.62,34.67 216.26,35.31 216.26,40.66 215.9,41.02 215.1,41.02
  Bottom 0.254: v65.28,20.42 63.42,20.42 v57.37,26.47 | v215.77,56.03 220.65,56.03 v224.56,59.94
  pour Top (no thermals): 0.38,84.96 304.93,84.96 304.93,0.22 305.18,-0.04 0.38,-0.04
  pour Bottom (no thermals): 0.38,84.96 305.18,84.96 305.18,0 0.38,0
LC1  (via drill 0.3 pad 0.6)  (1 unrouted)
  Top 0.254: v199.64,27.76 199.64,32.07 ADC1.1 | C16.2 114.43,51.67 114.43,52.47 112.85,54.04 IC1.4 112.21,51.99 111.89,51.66 R20.1 111.89,25.12 112.52,24.49 v122.28,24.49
  Bottom 0.254: v122.28,24.49 196.37,24.49 v199.64,27.76
LC1_OUT_N  (via drill 0.3 pad 0.6)
  Top 0.254: v54.02,44.25 53.52,44.75 50.6,44.75 50.29,44.45 IC6.2
  Bottom 0.254: LC1.1 92.34,61.98 80.82,61.98 71.65,52.81 56.39,52.81 54.02,50.44 v54.02,44.25
LC1_OUT_P  (via drill 0.3 pad 0.6)
  Top 0.254: v51.56,41.25 IC6.3
  Bottom 0.254: v51.56,41.25 83.21,41.25 112.9,70.94 LC1.2
LC1_PREC  (via drill 0.3 pad 0.6)
  Top 0.254: 45.41,43.85 48.02,46.46 51.05,46.46 51.56,46.97 IC6.6 | 45.41,43.85 45.5,43.85 v45.52,43.87 | RF1.1 45.41,43.85
  Bottom 0.254: v45.52,43.87 48.87,40.51 83.21,40.51 100.48,57.78 LCIN1.2
LC2  (via drill 0.3 pad 0.6)  (2 unrouted)
  Top 0.254: ADC1.2 200.41,33.34 200.69,33.06 v200.69,28.88 | v139.35,41.7 R23.1 139.35,51.56 139.39,51.6 IC2.4 140.26,54.04 141.18,53.12 C17.2
  Bottom 0.254: v200.69,28.88 198.3,28.88 193.63,33.55 147.51,33.55 v139.35,41.7
LC2_OUT_N  (via drill 0.3 pad 0.6)  (1 unrouted)
  Top 0.254: IC7.2 71.88,44.37 72.39,44.88 78.84,44.88 80.97,47.02 80.97,55.8 85.85,60.68 v91.82,60.68
  Bottom 0.254: v91.82,60.68 107.07,75.93 124.64,75.93 127.75,79.04
LC2_OUT_P  (via drill 0.3 pad 0.6)  (1 unrouted)
  Top 0.254: v83.44,55.93 82.63,55.12 82.63,46.63 77.5,41.5 73.41,41.5 73.15,41.76 IC7.3
  Bottom 0.254: 131.25,74.04 129.87,75.42 111.69,75.42 92.2,55.93 v83.44,55.93
LC2_PREC  (2 unrouted)
  Top 0.254: LCIN2.2 151.1,68.69 139.22,80.57 112.85,80.57 110.64,78.36 110.64,70.03 102.21,61.59 70.87,61.59 70.13,60.86 70.13,55.58 73.15,52.55 73.15,46.88 72.39,46.11 71.51,46.11 68.79,43.39 RF2.1
LC3  (via drill 0.3 pad 0.6)  (2 unrouted)
  Top 0.254: v162.85,43.63 R28.1 162.85,50.83 162.91,50.88 IC3.4 164.19,53.47 164.79,52.87 C22.2 | v198.37,35.69 198.43,35.69 198.43,35.45 199.26,34.61 ADC1.3
  Bottom 0.254: v162.85,43.63 169.6,36.88 196.65,36.88 197.84,35.69 v198.37,35.69
LC3_OUT_N  (1 unrouted)
  Top 0.254: IC8.2 91.31,45.31 91.97,45.97 98.42,45.97 102.62,50.16 102.62,60.9 120.75,79.04
LC3_OUT_P  (1 unrouted)
  Top 0.254: IC8.3 92.58,42.82 92.96,42.44 95.74,42.44 103.63,50.34 103.63,55.04 103.89,55.29 106.75,55.29 124.25,72.79 124.25,74.04
LC3_PREC  (via drill 0.3 pad 0.6)  (1 unrouted)
  Top 0.254: v101.58,55.35 98.15,58.78 89.15,58.78 88.8,58.42 88.8,56.52 92.58,52.73 92.58,47.8 92.23,47.45 86.34,47.45 RF3.1
  Bottom 0.254: LCIN3.2 174.37,59.05 170.94,55.63 166.19,55.63 161.82,59.99 136.88,59.99 130.23,53.34 103.58,53.34 v101.58,55.35
LC4  (via drill 0.3 pad 0.6)  (2 unrouted)
  Top 0.254: v195.73,33.48 196.01,33.75 196.01,41.81 192.69,45.13 R32.1 192.69,52.05 192.6,52.13 IC4.4 193.98,54.42 194.65,53.76 C24.2 | v198.75,30.4 197.69,31.47 197.69,36.07 197.99,36.37 198.88,36.37 199.05,36.2 199.05,35.88 ADC1.4
  Bottom 0.254: v195.73,33.48 195.73,33.43 v198.75,30.4
LC4_OUT_N  (via drill 0.3 pad 0.6)
  Top 0.254: IC9.2 62.74,19.74 v62.15,20.32
  Bottom 0.254: v62.15,20.32 62.23,19.74 65.63,19.74 77.04,31.14 82.17,31.14 99.97,48.95 99.97,56.13 100.86,57.02 122.58,57.02 123.96,55.63 125.72,55.63 125.72,61.13 143.63,79.04 145.55,79.04
LC4_OUT_P  (via drill 0.3 pad 0.6)
  Top 0.254: IC9.3 64.01,20.52 64.78,21.29 v68.28,21.29
  Bottom 0.254: v68.28,21.29 77.6,30.61 82.7,30.61 100.71,48.62 100.71,55.49 101.35,56.13 122.69,56.13 123.7,55.13 125.98,55.13 126.23,55.37 126.23,60.75 132.97,67.49 142.5,67.49 149.05,74.04
LC4_PREC  (via drill 0.3 pad 0.6)  (1 unrouted)
  Top 0.254: v78.99,28.98 71.91,28.98 67,33.88 61.59,33.88 61.24,33.53 61.24,30.15 64.01,27.38 IC9.6 64.01,22.43 63.25,21.67 58.85,21.67 56.78,19.59 RF4.1
  Bottom 0.254: v78.99,28.98 123.42,28.98 146.18,51.74 189.76,51.74 197.74,59.72 LCIN4.2
LC5  (via drill 0.3 pad 0.6)  (2 unrouted)
  Top 0.254: v221.03,48.67 221.01,48.68 R36.1 221.01,53.09 220.91,53.19 IC5.4 221.97,55.76 223.15,54.58 C28.2 | v198.43,37.95 198.43,37.85 199.12,37.15 ADC1.5
  Bottom 0.254: v221.03,48.67 212.22,39.85 200.33,39.85 v198.43,37.95
LC5_OUT_N  (2 unrouted)
  Top 0.254: 86.97,19.56 82.17,19.56 81.92,19.3 IC10.2 IC10.1 79.06,17.95 77.8,16.68 RF5.2 | 86.97,19.56 88.52,19.56 91.8,22.84 91.8,37.44 104.14,49.78 104.14,54.56 104.27,54.69 106.91,54.69 131.26,79.04 138.55,79.04 | RG5.2 88.49,22.08 88.49,21.08 86.97,19.56
LC5_OUT_P  (1 unrouted)
  Top 0.254: 142.05,74.04 134.99,66.98 123.19,66.98 119.05,62.84 119.05,57.78 119.25,57.58 120.65,57.58 121.18,57.05 121.18,51.21 120.65,50.67 119.02,50.67 114.96,54.74 111.51,54.74 111.16,54.39 111.16,45.78 110.8,45.41 103.25,45.41 95.43,37.59 95.43,6.1 94.16,4.83 90.35,4.83 83.19,11.99 IC10.3
LC5_PREC  (via drill 0.3 pad 0.6)  (3 unrouted)
  Top 0.254: v83.54,25.09 83.19,24.74 83.19,21.59 82.68,21.08 80.52,21.08 78.22,18.78 RF5.1
  Bottom 0.254: LCIN5.2 233.81,60.54 228.03,54.76 198.27,54.76 190.81,47.3 143.13,47.3 120.93,25.09 v83.54,25.09
MISO  (via drill 0.3 pad 0.6)  (3 unrouted)
  Top 0.254: v235.59,37.21 ADC3.12 | ADC1.12 195.3,37.15 v195.31,37.67 | v213.84,37.21 ADC2.12
  Bottom 0.254: *.21 252.12,49.48 235.59,49.48 v235.59,37.21 230.63,42.16 218.8,42.16 v213.84,37.21 200.72,37.21 200.01,36.5 197.74,36.5 196.57,37.67 v195.31,37.67
MOSI  (via drill 0.3 pad 0.6)  (3 unrouted)
  Top 0.254: ADC2.11 214.1,38.48 v213.59,38.99 | v237.36,52.15 230.15,44.93 230.15,39.22 230.89,38.48 ADC3.11 | ADC1.11 195.07,38.42 195.33,38.67 v195.33,41.43
  Bottom 0.254: 226.75,52.15 206.04,52.15 v195.33,41.43 | 226.75,52.15 v237.36,52.15 252.25,52.15 *.19 | v213.59,38.99 226.75,52.15
NET3V3_K
  Top 0.254: R41.1 20.95,7.21 20.83,7.09 3V3.2
NET5V_K  (1 unrouted)
  Top 0.254: R38.1 29.59,7.15 29.63,7.11 5V.2
NET10V_K  (1 unrouted)
  Top 0.254: R39.2 38.48,7.15 38.44,7.11 10V.2
NET12V_A
  Top 0.254: D8.2 36.96,38.65 VR1.1 27.39,28.47 26.03,28.47 C36.2
  Bottom 0.254: VR1.1 44.7,11.77 12V.1
NET12V_K
  Top 0.254: 12V.2 R40.2
NETC16_1  (2 unrouted)
  Top 0.254: C16.1 117.55,49.57 117.6,49.62 R18.1
NETC17_1  (3 unrouted)
  Top 0.254: R21.1 144.27,51.07 144.22,51.02 C17.1
NETC20_1  (2 unrouted)
  Top 0.254: IC1.1 110.49,55.94 113.88,59.33 116.06,59.33 119.13,56.26 C20.1 120.11,54.01 120.05,53.95 R19.1
NETC21_1  (3 unrouted)
  Top 0.254: IC2.1 137.86,55.94 138.56,55.24 143.69,55.24 145.69,57.24 C21.1 146.52,55.23 146.46,55.17 R22.1
NETC22_1  (1 unrouted)
  Top 0.254: C22.1 168.5,50.77 168.63,50.89 R27.2 173.41,50.89 173.53,51.02 R26.1
NETC24_1  (3 unrouted)
  Top 0.254: C24.1 198.43,51.66 198.47,51.7 R29.1
NETC25_1  (2 unrouted)
  Top 0.254: IC3.1 160.4,57.15 161.01,57.76 168.44,57.76 169.22,56.99 C25.1 171.1,54.99 171.07,54.97 R27.1
NETC27_1  (3 unrouted)
  Top 0.254: IC4.1 190.72,56.32 191.41,55.63 195.46,55.63 197.97,58.13 C27.1 200.94,55.99 200.88,55.93 R30.1
NETC28_1
  Top 0.254: C28.1 227.23,52.48 227.28,52.53 R35.2 R34.1
NETC30_1  (via drill 0.3 pad 0.6)  (2 unrouted)
  Top 0.254: v229.9,60.17 229.9,58.96 C30.1 229.75,56.81 229.69,56.74 R35.1 | IC5.1 216.94,57.66 v216.69,57.4
  Bottom 0.254: v216.69,57.4 220.65,57.4 223.88,60.63 229.44,60.63 v229.9,60.17
NETC48_1
  Top 0.254: C48.1 142.21,26.09 140.07,28.23 R62.1 R63.2
NETC49_1  (1 unrouted)
  Top 0.254: R63.1 C49.1 146.63,34.45 147.12,33.97 IC15.1
NETC50_1
  Top 0.254: C50.1 139.9,5.93 R64.1 R65.2
NETC51_1  (1 unrouted)
  Top 0.254: IC16.1 145.74,11.91 C51.1 R65.1
NETC54_1
  Top 0.254: C54.1 164.28,25.49 R66.1 R67.2
NETC55_1  (1 unrouted)
  Top 0.254: R67.1 C55.1 169.24,33.69 169.97,32.95 IC17.1
NETC56_1
  Top 0.254: C56.1 163.97,5.3 162,7.27 R68.1 160.53,9.32 160.66,9.45 R69.2
NETC57_1
  Top 0.254: IC18.1 168.38,13.02 167.64,13.75 C57.1 163.07,13.75 162.94,13.62 R69.1
NETIC1_3
  Top 0.254: R20.2 109.79,51.61 109.71,51.69 IC1.3 107.47,54.04 107.37,53.94 R24.1
NETIC2_3  (2 unrouted)
  Top 0.254: R23.2 137.25,51.41 136.89,51.77 IC2.3 134.62,54.04 134.59,54.07 R25.1
NETIC3_3  (2 unrouted)
  Top 0.254: R28.2 160.75,50.67 160.41,51.01 IC3.3 158.43,53.47 158.39,53.43 R31.1
NETIC4_3  (2 unrouted)
  Top 0.254: R32.2 190.59,51.84 190.1,52.33 IC4.3 187.86,54.42 187.76,54.32 R33.1
NETIC5_3  (1 unrouted)
  Top 0.254: R37.1 214.63,55.97 215.25,55.35 218.08,55.35 218.08,55.76 IC5.3 218.41,53.39 218.91,52.88 R36.2
NETIC6_1
  Top 0.254: RG1.2 55.31,44.23 54.28,45.26 49.58,45.26 49.02,44.7 IC6.1 49.02,42.49 44.31,42.49 RF1.2
NETIC6_5
  Top 0.254: RG1.1 53.49,46.33 52.83,46.99 IC6.5 52.83,55.24 RZ1.3
NETIC7_1  (1 unrouted)
  Top 0.254: RG2.2 73.09,45.79 72.9,45.6 71.76,45.6 70.61,44.46 70.61,41.94 69.97,41.29 RF2.2
NETIC7_5  (1 unrouted)
  Top 0.254: 76.89,47.89 74.42,47.89 IC7.5 | 76.89,47.89 RG2.1 | 76.89,47.89 76.27,48.51 76.27,52.17 RZ2.3
NETIC8_1
  Top 0.254: RG3.2 93.67,46.96 93.66,46.94 91.15,46.94 90.04,45.83 IC8.1 87.49,43.98 86.72,43.21 RF3.2
NETIC8_5
  Top 0.254: RZ3.3 93.85,53.72 IC8.5 95.71,48.98 95.78,49.06 RG3.1
NETIC9_1
  Top 0.254: RG4.2 64.53,22.19 63.47,21.13 61.72,21.13 61.47,20.88 IC9.1 61.47,17.62 61.34,17.49 RF4.2
NETIC9_5
  Top 0.254: 68.25,24.29 65.73,24.29 IC9.5 | RZ4.3 62.23,30.31 68.25,24.29 | 68.25,24.29 RG4.1
NETIC10_5  (1 unrouted)
  Top 0.254: RG5.1 85.69,24.18 IC10.5 84.45,29.8 RZ5.3
NETIC11_1  (1 unrouted)
  Top 0.254: IC11.1 102.78,30.35 R48.1 R42.2
NETIC11_3  (1 unrouted)
  Top 0.254: R50.2 102.58,24.99 102.15,25.43 IC11.3 99.73,27.82 99.57,27.65 R45.1
NETIC12_1  (2 unrouted)
  Top 0.254: IC12.1 122.32,31.75 122.59,32.02 R49.1 R43.2
NETIC12_3  (1 unrouted)
  Top 0.254: R51.2 122.78,22.6 123.03,22.85 123.03,25.55 122.32,26.25 IC12.3 120.02,27.5 119.86,27.65 R47.1
NETIC13_1
  Top 0.254: IC13.1 122.46,11.12 R58.1 124.18,15.37 124.31,15.49 R52.2
NETIC13_3
  Top 0.254: R55.1 118.95,8.09 119.17,8.32 IC13.3 121.56,6.98 121.63,6.91 R60.2
NETIC14_1
  Top 0.254: IC14.1 102.56,9.84 104.56,11.84 R59.1 R53.2
NETIC14_3
  Top 0.254: R57.1 99.95,7.84 100.05,7.94 IC14.3 102.13,6.78 102.33,6.58 R61.2
NETLCIN1_1  (1 unrouted)
  Top 0.254: LCIN1.1 124.84,54.14 124.81,54.1 R18.2
NETLCIN2_1  (2 unrouted)
  Top 0.254: LCIN2.1 151.1,55.37 151.02,55.3 R21.2
NETLCIN3_1
  Top 0.254: LCIN3.1 175.99,55.49 175.9,55.4 R26.2
NETLCIN4_1  (2 unrouted)
  Top 0.254: LCIN4.1 205.78,56.16 205.71,56.08 R29.2
NETLCIN5_1  (1 unrouted)
  Top 0.254: LCIN5.1 234.59,56.97 234.51,56.9 R34.2
NETQ1_1
  Top 0.254: 18.34,76.8 14.55,73.02 14.55,68.83 15.38,68.01 R4.2 | R7.2 18.34,76.8 | 18.34,76.8 Q1.1
NETQ2_1
  Top 0.254: R8.2 27.66,76.8 Q2.1 30.48,76.59 R5.2
NETQ3_1
  Top 0.254: R9.2 36.98,76.8 Q3.1 40.06,76.33 40.06,68.01 R6.2
NETQ4_1
  Top 0.254: R13.2 46.3,76.8 Q4.1 49.53,76.18 R10.2
NETQ5_1
  Top 0.254: R11.2 62.35,68.01 63.17,68.83 63.17,70.36 62.53,70.99 59.69,70.99 59.18,71.5 59.18,75.85 Q5.1 55.62,76.8 R14.2
NETQ6_1  (1 unrouted)
  Top 0.254: R15.2 64.94,76.8 Q6.1 67.56,76.79 67.56,68.01 R12.2
PT1  (via drill 0.3 pad 0.6)  (2 unrouted)
  Top 0.254: v220.55,31.01 220.55,32.13 ADC2.1 | v158.5,16.1 152.4,10.01 IC16.3
  Bottom 0.254: v220.55,31.01 210.19,20.65 210.19,18.95 209.55,18.31 160.71,18.31 v158.5,16.1
PT1_OUT  (via drill 0.3 pad 0.6)
  Top 0.254: 163.35,79.04 163.35,63.93 v157.56,58.14 | v98.59,35.81 97.79,35.02 R44.2 97.03,32.44 97.16,32.31 R45.2
  Bottom 0.254: v157.56,58.14 155.75,56.33 136.9,56.33 116.38,35.81 v98.59,35.81
PT1_PREC  (via drill 0.3 pad 0.6)
  Top 0.254: v105.79,22.68 105.72,22.61 R50.1 104.68,25.17 104.65,25.2 IC11.4 | v135.13,18.31 135.13,7.67 136.74,6.06 R64.2
  Bottom 0.254: v105.79,22.68 130.76,22.68 v135.13,18.31
PT2  (via drill 0.3 pad 0.6)  (2 unrouted)
  Top 0.254: 151.13,32.07 IC15.4 | ADC2.2 219.18,33.4 v218.49,34.09 | v151.13,35.18 150.77,34.82 150.77,32.43 151.13,32.07 | IC15.3 151.13,32.07
  Bottom 0.254: v218.49,34.09 197.26,34.09 196.16,35.18 v151.13,35.18
PT2_OUT  (via drill 0.3 pad 0.6)
  Top 0.254: v127.99,60.96 127.99,43.88 118.62,34.51 R46.2 R47.2
  Bottom 0.254: v127.99,60.96 138.26,60.96 156.35,79.04
PT2_PREC  (2 unrouted)
  Top 0.254: R62.2 136.83,26.13 136.78,26.18 136.78,36.32 135.94,37.16 127.15,37.16 126.31,36.32 126.31,32.28 123.98,29.95 123.98,27.69 124.17,27.5 IC12.4 124.82,24.82 124.88,24.77 R51.1
PT3  (via drill 0.3 pad 0.6)  (1 unrouted)
  Top 0.254: v219.71,34.09 219.71,34.67 ADC2.3 | IC18.3 172.34,11.12 | 172.34,11.12 IC18.4 | v173.05,20.09 172.24,19.28 172.24,11.22 172.34,11.12
  Bottom 0.254: v219.71,34.09 216.74,31.12 207.07,31.12 196.04,20.09 v173.05,20.09
PT3_OUT
  Top 0.254: 181.14,79.04 181.14,54.7 166.75,40.31 140,40.31 138.05,38.35 138.05,27.69 138.86,26.87 139.95,26.87 140.08,26.75 140.08,24.64 139.57,24.13 131.5,24.13 129.08,21.72 129.08,9.63 128.78,9.32 123.52,9.32 122.4,8.2 122.4,4.83 122.15,4.57 117.55,4.57 115.57,6.55 115.57,9.94 115.82,10.19 R55.2 R54.2
PT3_PREC  (1 unrouted)
  Top 0.254: R68.2 127.36,5.17 126.95,5.59 R60.1 123.73,6.78 124.06,7.11 IC13.4
PT4  (via drill 0.3 pad 0.6)  (1 unrouted)
  Top 0.254: 173.44,31.05 IC17.4 | 173.44,31.05 173.25,31.24 173.25,34.24 v173.41,34.39 | v217.81,33.22 217.81,35.31 218.44,35.94 ADC2.4 | IC17.3 173.44,31.05
  Bottom 0.254: v173.41,34.39 195.81,34.39 196.98,33.22 v217.81,33.22
PT4_OUT  (via drill 0.3 pad 0.6)
  Top 0.254: 174.14,79.04 174.14,71.91 v158.06,55.82 | v103.61,32.64 103.61,18.8 98.75,13.94 R56.2 R57.2
  Bottom 0.254: v158.06,55.82 145.26,55.82 122.07,32.64 v103.61,32.64
PT4_PREC  (1 unrouted)
  Top 0.254: R66.2 160.27,25.62 159.31,24.66 159.31,6.86 160.25,5.92 161.42,5.92 161.54,5.79 161.54,4.24 161.29,3.99 105.27,3.99 104.43,4.83 R61.1 104.43,6.58 104.63,6.78 IC14.4
SCK  (via drill 0.3 pad 0.6)  (4 unrouted)
  Top 0.254: 236.12,35.71 236.35,35.94 ADC3.13 | ADC2.13 214.22,35.94 213.89,36.28 v213.82,36.28 | ADC1.13 v195.3,35.88
  Bottom 0.254: *.23 252.12,46.94 246.07,46.94 240.54,41.41 240.54,40.14 236.12,35.71 230.32,41.51 219.71,41.51 214.48,36.28 v213.82,36.28 212.54,35 197.72,35 196.84,35.88 v195.3,35.88
TC1  (via drill 0.3 pad 0.6)
  Top 0.254: v235.89,62 238.86,59.03 238.86,32.21 239.75,31.32 240.41,31.32 241.22,32.13 242.6,32.13
  Bottom 0.254: 202.44,74.04 214.48,62 v235.89,62
TC2  (via drill 0.3 pad 0.6)
  Top 0.254: v243.92,80.47 245.26,79.12 245.26,35.08 243.59,33.4 242.6,33.4
  Bottom 0.254: 198.94,79.04 200.36,80.47 v243.92,80.47
TC3  (via drill 0.3 pad 0.6)  (1 unrouted)
  Top 0.254: ADC3.3 243.38,34.67 244.75,36.04 244.75,53.77 v244.3,54.23
  Bottom 0.254: v244.3,54.23 242.19,54.23 234.97,61.44 208.04,61.44 195.44,74.04
TC4  (via drill 0.3 pad 0.6)  (1 unrouted)
  Top 0.254: ADC3.4 243.15,35.94 244.25,37.04 244.25,43.92 243.53,44.63 243.53,55.4 244.47,56.34 244.47,75.04 242.62,76.89 v242.62,81.79
  Bottom 0.254: v242.62,81.79 194.69,81.79 191.94,79.04

## Text on the board
tPlace: ARCA 1.0 Rice Eclipse 10/3/2020 ABC & ASC